# EAGLE board front pane - v2 (EAGLE 9.2.2)
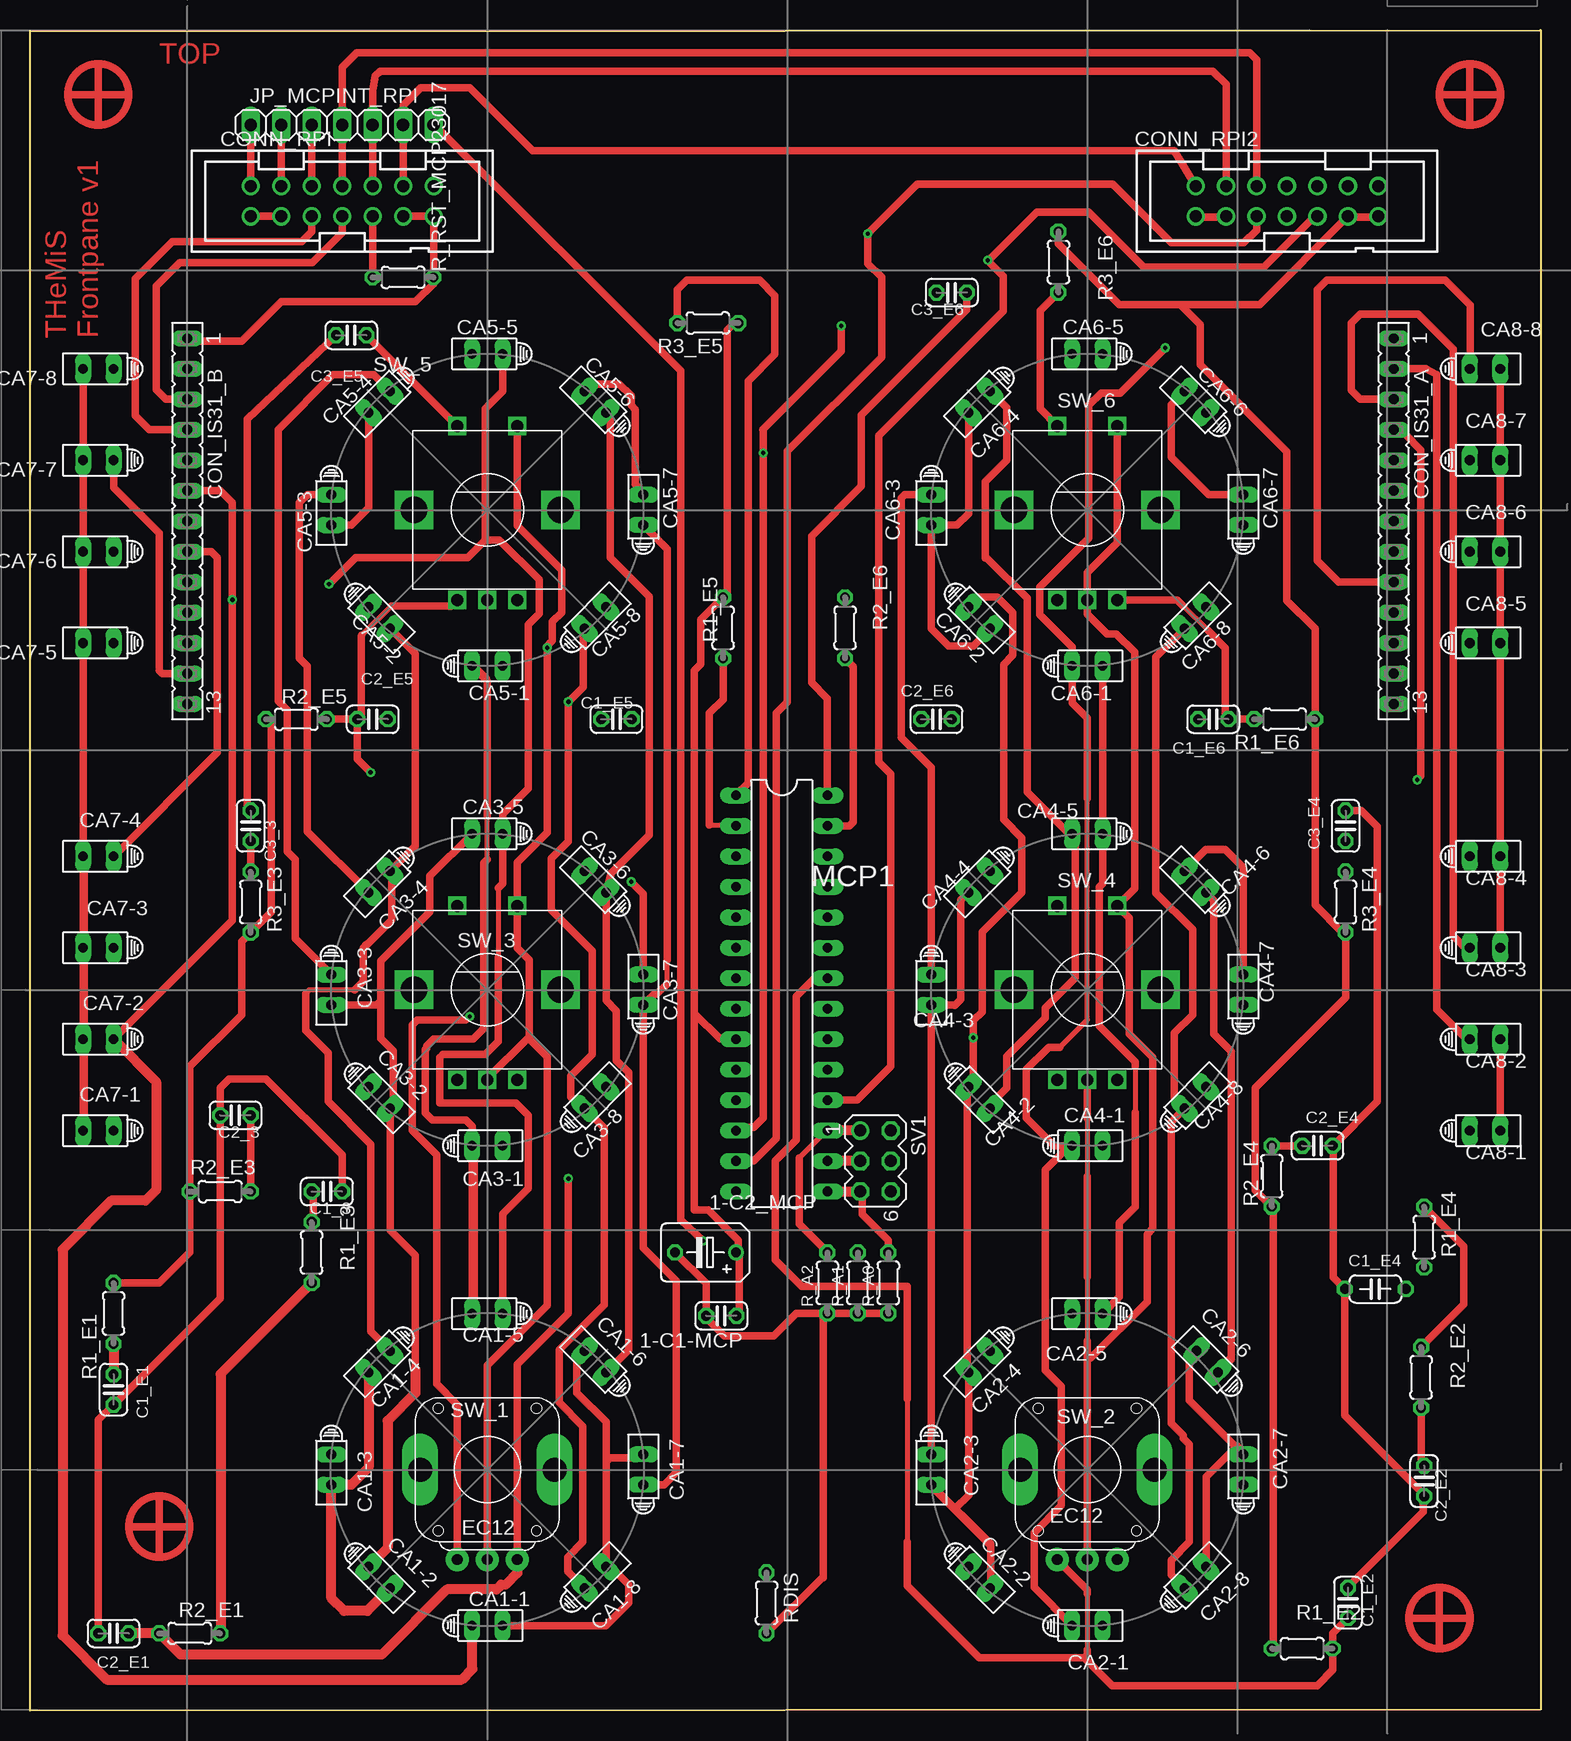
[diagram p0: board, top side]
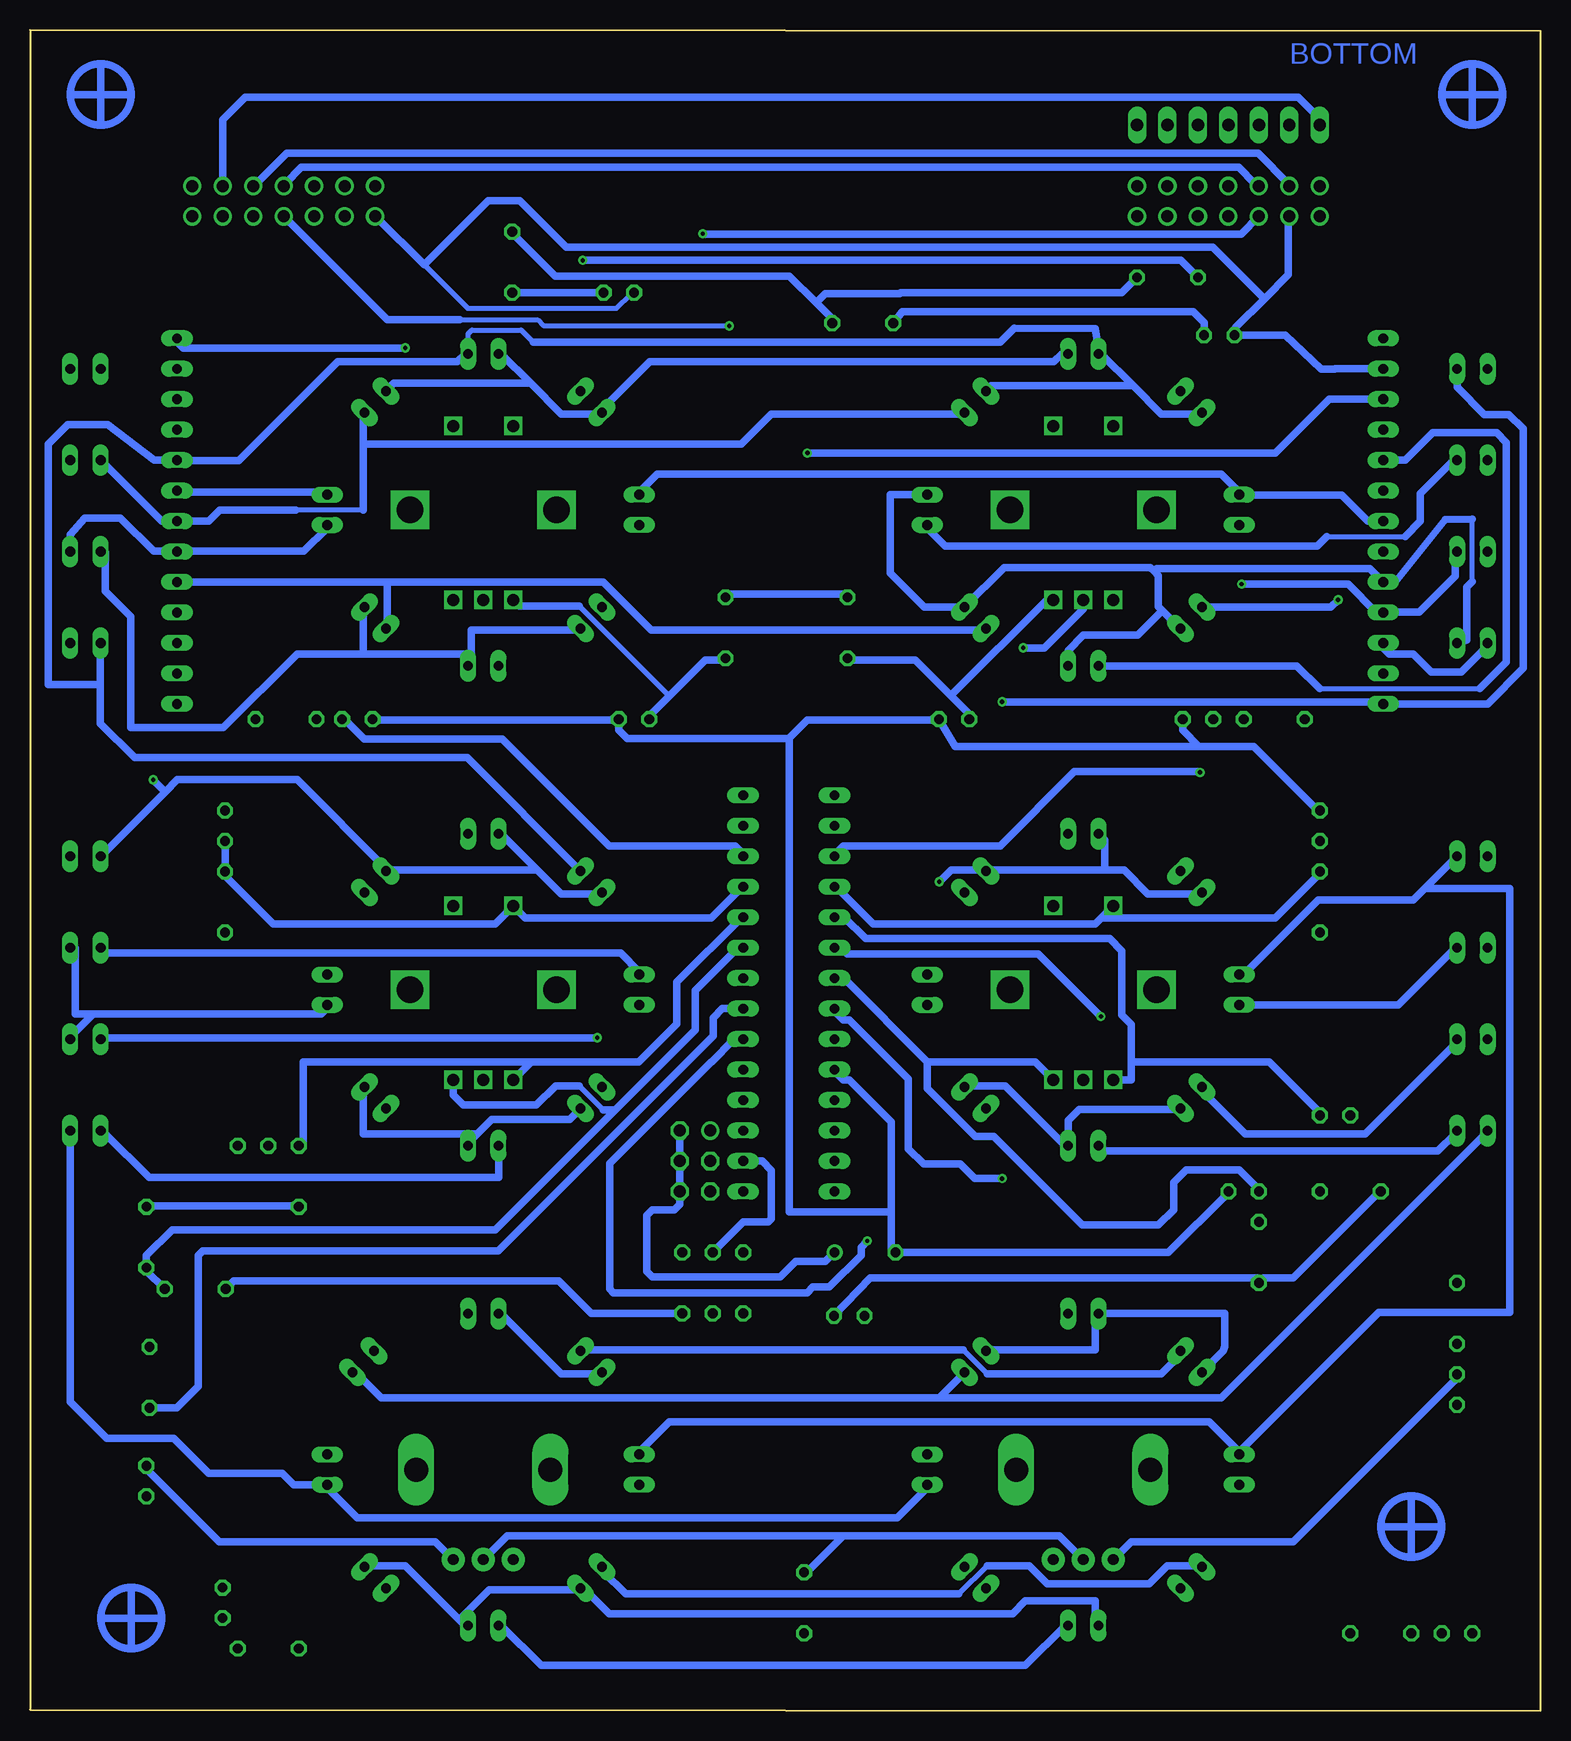
[diagram p1: board, bottom side, seen from below]

Size 125.88 x 140.1 mm. Coordinates in mm from the lower left corner, seen from the top.
Outline: 0,0 0,140 125.88,140.1 125.88,0.1 0,0
Copper layers (1*16): Top 0.035mm / dielectric 1.5mm / Bottom 0.035mm
Design rules "default *": minimum track width 0.4mm, minimum drill 0.35mm, track to track 0.4mm, track to pad 0.4mm, pad to pad 0.4mm, via to via 0.4mm, smd to smd 0.4mm, copper to edge 40mil, drill to drill 6mil, minimum pad ring 10mil, minimum via ring 8mil, stop-mask expansion 4mil, vias tented up to drill 0mil, thermal gap 0.4mm

## Footprints (pad centres in the part's own frame; a part is rotated, then mirrored left to right if it is on the bottom)
C025-024X044 = drill 0.813 octagon: 1 -1.27,0; 2 1.27,0
B45181B = drill 0.813: + -2.54,0 | drill 0.813 octagon: - 2.54,0
C050-024X044 = drill 0.813 octagon: 1 -2.54,0; 2 2.54,0
HLMP6 = drill 0.813 long: A -1.27,0; K 1.27,0
FE13 = drill 0.813 long: 1 -15.24,0; 2 -12.7,0; 3 -10.16,0; 4 -7.62,0; 5 -5.08,0; 6 -2.54,0; 7 0,0; 8 2.54,0; 9 5.08,0; 10 7.62,0; 11 10.16,0; 12 12.7,0; 13 15.24,0
PAK100/2500-14 = drill 1 pad 1.422: 1 -7.62,-1.27; 2 -7.62,1.27; 3 -5.08,-1.27; 4 -5.08,1.27; 5 -2.54,-1.27; 6 -2.54,1.27; 7 0,-1.27; 8 0,1.27; 9 2.54,-1.27; 10 2.54,1.27; 11 5.08,-1.27; 12 5.08,1.27; 13 7.62,-1.27; 14 7.62,1.27
1X07 = drill 1.016 long: 1 -7.62,0; 2 -5.08,0; 3 -2.54,0; 4 0,0; 5 2.54,0; 6 5.08,0; 7 7.62,0
DIL28-3 = drill 0.813 long: 1 -16.51,-3.81; 2 -13.97,-3.81; 3 -11.43,-3.81; 4 -8.89,-3.81; 5 -6.35,-3.81; 6 -3.81,-3.81; 7 -1.27,-3.81; 8 1.27,-3.81; 9 3.81,-3.81; 10 6.35,-3.81; 11 8.89,-3.81; 12 11.43,-3.81; 13 13.97,-3.81; 14 16.51,-3.81; 15 16.51,3.81; 16 13.97,3.81; 17 11.43,3.81; 18 8.89,3.81; 19 6.35,3.81; 20 3.81,3.81; 21 1.27,3.81; 22 -1.27,3.81; 23 -3.81,3.81; 24 -6.35,3.81; 25 -8.89,3.81; 26 -11.43,3.81; 27 -13.97,3.81; 28 -16.51,3.81
0204/5 = drill 0.813 octagon: 1 -2.54,0; 2 2.54,0
MA03-2 = drill 1.016: 1 -2.54,-1.27 | drill 1.016 octagon: 2 -2.54,1.27; 3 0,-1.27; 4 0,1.27; 5 2.54,-1.27; 6 2.54,1.27
EC12 = drill 0.9 pad 1.93: 1 -2.5,-7.5; 2 0,-7.5; 3 2.5,-7.5 | drill 2 long: M1 -5.6,0; M2 5.6,0
ALPS_EC12E_SW = drill 1 square: A -2.5,-7.5; B 2.5,-7.5; C 0,-7.5; D -2.5,7; E 2.5,7 | drill 2.2 square: GND1 -6.1,0; GND2 6.1,0

## Placement (x,y rotation side)
1-C1-MCP  100n  [C025-024X044]  57.61,32.92 180 top
1-C2_MCP  10u  [B45181B]  56.29,38.2 180 top
C1_3  100n  [C025-024X044]  24.74,43.28 0 top
C1_E1  100n  [C025-024X044]  6.96,26.77 270 top
C1_E2  100n  [C025-024X044]  109.83,8.99 90 top
C1_E4  100n  [C050-024X044]  112.12,35.15 180 top
C1_E5  100n  [C025-024X044]  48.87,82.65 0 top
C1_E6  100n  [C025-024X044]  98.6,82.65 180 top
C2_3  100n  [C025-024X044]  17.12,49.63 180 top
C2_E1  100n  [C025-024X044]  6.96,6.45 180 top
C2_E2  100n  [C025-024X044]  116.18,19.15 270 top
C2_E4  100n  [C025-024X044]  107.29,47.09 0 top
C2_E5  100n  [C025-024X044]  28.55,82.65 0 top
C2_E6  100n  [C025-024X044]  75.54,82.65 0 top
C3_3  100n  [C025-024X044]  18.39,73.76 90 top
C3_E4  100n  [C025-024X044]  109.63,73.76 90 top
C3_E5  100n  [C025-024X044]  26.77,114.66 180 top
C3_E6  100n  [C025-024X044]  76.81,118.21 180 top
CA1-1  HLMP6  [HLMP6]  38.11,7.1 0 top
CA1-2  HLMP6  [HLMP6]  29.11,11.1 315 top
CA1-3  HLMP6  [HLMP6]  25.11,20.1 270 top
CA1-4  HLMP6  [HLMP6]  29.11,29.1 225 top
CA1-5  HLMP6  [HLMP6]  38.11,33.1 180 top
CA1-6  HLMP6  [HLMP6]  47.11,29.1 135 top
CA1-7  HLMP6  [HLMP6]  51.11,20.1 90 top
CA1-8  HLMP6  [HLMP6]  47.11,11.1 45 top
CA2-1  HLMP6  [HLMP6]  88.11,7.1 0 top
CA2-2  HLMP6  [HLMP6]  79.11,11.1 315 top
CA2-3  HLMP6  [HLMP6]  75.11,20.1 270 top
CA2-4  HLMP6  [HLMP6]  79.11,29.1 225 top
CA2-5  HLMP6  [HLMP6]  88.11,33.1 180 top
CA2-6  HLMP6  [HLMP6]  98.11,29.1 135 top
CA2-7  HLMP6  [HLMP6]  101.11,20.1 90 top
CA2-8  HLMP6  [HLMP6]  97.11,11.1 45 top
CA3-1  HLMP6  [HLMP6]  38.11,47.1 0 top
CA3-2  HLMP6  [HLMP6]  29.11,51.1 315 top
CA3-3  HLMP6  [HLMP6]  25.11,60.1 270 top
CA3-4  HLMP6  [HLMP6]  29.11,69.1 225 top
CA3-5  HLMP6  [HLMP6]  38.11,73.1 180 top
CA3-6  HLMP6  [HLMP6]  47.11,69.1 135 top
CA3-7  HLMP6  [HLMP6]  51.11,60.1 90 top
CA3-8  HLMP6  [HLMP6]  47.11,51.1 45 top
CA4-1  HLMP6  [HLMP6]  88.11,47.1 0 top
CA4-2  HLMP6  [HLMP6]  79.11,51.1 315 top
CA4-3  HLMP6  [HLMP6]  75.11,60.1 270 top
CA4-4  HLMP6  [HLMP6]  79.11,69.1 225 top
CA4-5  HLMP6  [HLMP6]  88.11,73.1 180 top
CA4-6  HLMP6  [HLMP6]  97.11,69.1 135 top
CA4-7  HLMP6  [HLMP6]  101.11,60.1 90 top
CA4-8  HLMP6  [HLMP6]  97.11,51.1 45 top
CA5-1  HLMP6  [HLMP6]  38.11,87.1 0 top
CA5-2  HLMP6  [HLMP6]  29.11,91.1 315 top
CA5-3  HLMP6  [HLMP6]  25.11,100.1 270 top
CA5-4  HLMP6  [HLMP6]  29.11,109.1 225 top
CA5-5  HLMP6  [HLMP6]  38.11,113.1 180 top
CA5-6  HLMP6  [HLMP6]  47.11,109.1 135 top
CA5-7  HLMP6  [HLMP6]  51.11,100.1 90 top
CA5-8  HLMP6  [HLMP6]  47.11,91.1 45 top
CA6-1  HLMP6  [HLMP6]  88.11,87.1 0 top
CA6-2  HLMP6  [HLMP6]  79.11,91.1 315 top
CA6-3  HLMP6  [HLMP6]  75.11,100.1 270 top
CA6-4  HLMP6  [HLMP6]  79.11,109.1 225 top
CA6-5  HLMP6  [HLMP6]  88.11,113.1 180 top
CA6-6  HLMP6  [HLMP6]  97.11,109.1 135 top
CA6-7  HLMP6  [HLMP6]  101.11,100.1 90 top
CA6-8  HLMP6  [HLMP6]  97.11,91.1 45 top
CA7-1  HLMP6  [HLMP6]  5.69,48.36 180 top
CA7-2  HLMP6  [HLMP6]  5.69,55.98 180 top
CA7-3  HLMP6  [HLMP6]  5.69,63.6 180 top
CA7-4  HLMP6  [HLMP6]  5.69,71.22 180 top
CA7-5  HLMP6  [HLMP6]  5.69,89 180 top
CA7-6  HLMP6  [HLMP6]  5.69,96.62 180 top
CA7-7  HLMP6  [HLMP6]  5.69,104.24 180 top
CA7-8  HLMP6  [HLMP6]  5.69,111.86 180 top
CA8-1  HLMP6  [HLMP6]  121.26,48.36 0 top
CA8-2  HLMP6  [HLMP6]  121.26,55.98 0 top
CA8-3  HLMP6  [HLMP6]  121.26,63.6 0 top
CA8-4  HLMP6  [HLMP6]  121.26,71.22 0 top
CA8-5  HLMP6  [HLMP6]  121.26,89 0 top
CA8-6  HLMP6  [HLMP6]  121.26,96.62 0 top
CA8-7  HLMP6  [HLMP6]  121.26,104.24 0 top
CA8-8  HLMP6  [HLMP6]  121.26,111.86 0 top
CON_IS31_A  [FE13]  113.64,99.16 270 top
CON_IS31_B  [FE13]  13.11,99.16 270 top
CONN_RPI  2514-  [PAK100/2500-14]  26.01,125.83 0 top
CONN_RPI2  2514-  [PAK100/2500-14]  104.75,125.83 0 top
JP_MCPINT_RPI  [1X07]  26.01,132.18 0 top
MCP1  MCP23017SP  [DIL28-3]  62.64,59.79 270 top
R1_E1  100k  [0204/5]  6.96,33.12 270 top
R1_E2  100k  [0204/5]  106.02,5.18 0 top
R1_E3  100k  [0204/5]  23.47,38.2 90 top
R1_E4  100k  [0204/5]  116.18,39.47 270 top
R1_E5  100k  [0204/5]  57.76,90.27 270 top
R1_E6  100k  [0204/5]  104.55,82.65 180 top
R2_E1  100k  [0204/5]  13.31,6.45 180 top
R2_E2  100k  [0204/5]  115.93,27.79 270 top
R2_E3  100k  [0204/5]  15.85,43.28 0 top
R2_E4  100k  [0204/5]  103.48,44.55 90 top
R2_E5  100k  [0204/5]  22.2,82.65 0 top
R2_E6  100k  [0204/5]  67.92,90.27 270 top
R3_E3  100k  [0204/5]  18.39,67.41 90 top
R3_E4  100k  [0204/5]  109.63,67.41 90 top
R3_E5  100k  [0204/5]  56.49,115.67 180 top
R3_E6  100k  [0204/5]  85.7,120.75 270 top
R_A0  20k  [0204/5]  71.53,35.66 90 top
R_A1  20k  [0204/5]  68.99,35.66 90 top
R_A2  20k  [0204/5]  66.45,35.66 90 top
R_RST_MCP23017  100k  [0204/5]  31.09,119.48 180 top
RDIS  1k  [0204/5]  61.37,8.99 270 top
SV1  [MA03-2]  70.46,45.82 270 top
SW_1  EC12  [EC12]  38.11,20.1 0 top
SW_2  EC12  [EC12]  88.11,20.1 0 top
SW_3  EC12E_SW  [ALPS_EC12E_SW]  38.11,60.1 0 top
SW_4  EC12E_SW  [ALPS_EC12E_SW]  88.11,60.1 0 top
SW_5  EC12E_SW  [ALPS_EC12E_SW]  38.11,100.1 0 top
SW_6  EC12E_SW  [ALPS_EC12E_SW]  88.11,100.1 0 top

## Library data of the parts
1-C1-MCP 1-C2_MCP C1_3 C1_E1 C1_E2 C1_E4-C1_E6 C2_3 C2_E1 C2_E2 C2_E4-C2_E6 C3_3 C3_E4-C3_E6 = rcl; SPICEPREFIX: C
CA1-1-CA1-8 CA2-1-CA2-8 CA3-1-CA3-8 CA4-1-CA4-8 CA5-1-CA5-8 CA6-1-CA6-8 CA7-1-CA7-8 CA8-1-CA8-8 = display-hp; MF: AGILENT TECHNOLOGIES; MPN: HLMP-6500; OC_FARNELL: 1652490; OC_NEWARK: 40K0088
CON_IS31_A CON_IS31_B = con-lsta; OC_FARNELL: unknown; OC_NEWARK: unknown
CONN_RPI CONN_RPI2 = con-3m; OC_FARNELL: unknown; OC_NEWARK: unknown
JP_MCPINT_RPI = pinhead
MCP1 = microchip; MF: MICROCHIP; MPN: MCP23017-E/SP; OC_FARNELL: 1332088; OC_NEWARK: 31K2959
R1_E1-R1_E6 R2_E1-R2_E6 R3_E3-R3_E6 R_A0 R_A1 R_A2 R_RST_MCP23017 RDIS = resistor
SV1 = con-lstb; OC_FARNELL: unknown; OC_NEWARK: unknown
SW_1 SW_2 = rotary-encoder
SW_3-SW_6 = switch-alps; MPN: EC12E2424407; OC_FARNELL: 1520813; OC_NEWARK: 74M1068

## Nets
A0: MCP1.15 R_A0.2 SV1.5
A1: MCP1.16 R_A1.2 SV1.3
A2: MCP1.17 R_A2.2 SV1.1
CA1: CA1-1.K CA1-2.K CA1-3.K CA1-4.K CA1-5.K CA1-6.K CA1-7.K CA1-8.K CA2-1.A CA3-1.A CA4-1.A CA5-1.A CA6-1.A CA7-1.A CA8-1.A CON_IS31_A.1 CON_IS31_B.5
CA2: CA1-1.A CA2-1.K CA2-2.K CA2-3.K CA2-4.K CA2-5.K CA2-6.K CA2-7.K CA2-8.K CA3-2.A CA4-2.A CA5-2.A CA6-2.A CA7-2.A CA8-2.A CON_IS31_A.2 CON_IS31_B.6
CA3: CA1-2.A CA2-2.A CA3-1.K CA3-2.K CA3-3.K CA3-4.K CA3-5.K CA3-6.K CA3-7.K CA3-8.K CA4-3.A CA5-3.A CA6-3.A CA7-3.A CA8-3.A CON_IS31_A.3 CON_IS31_B.7
CA4: CA1-3.A CA2-3.A CA3-3.A CA4-1.K CA4-2.K CA4-3.K CA4-4.K CA4-5.K CA4-6.K CA4-7.K CA4-8.K CA5-4.A CA6-4.A CA7-4.A CA8-4.A CON_IS31_A.4 CON_IS31_B.8
CA5: CA1-4.A CA2-4.A CA3-4.A CA4-4.A CA5-1.K CA5-2.K CA5-3.K CA5-4.K CA5-5.K CA5-6.K CA5-7.K CA5-8.K CA6-5.A CA7-5.A CA8-5.A CON_IS31_A.5 CON_IS31_B.9
CA6: CA1-5.A CA2-5.A CA3-5.A CA4-5.A CA5-5.A CA6-1.K CA6-2.K CA6-3.K CA6-4.K CA6-5.K CA6-6.K CA6-7.K CA6-8.K CA7-6.A CA8-6.A CON_IS31_A.6 CON_IS31_B.10
CA7: CA1-6.A CA2-6.A CA3-6.A CA4-6.A CA5-6.A CA6-6.A CA7-1.K CA7-2.K CA7-3.K CA7-4.K CA7-5.K CA7-6.K CA7-7.K CA7-8.K CA8-7.A CON_IS31_A.7 CON_IS31_B.11
CA8: CA1-7.A CA2-7.A CA3-7.A CA4-7.A CA5-7.A CA6-7.A CA7-7.A CA8-1.K CA8-2.K CA8-3.K CA8-4.K CA8-5.K CA8-6.K CA8-7.K CA8-8.K CON_IS31_A.8 CON_IS31_B.12
CA9: CA1-8.A CA2-8.A CA3-8.A CA4-8.A CA5-8.A CA6-8.A CA7-8.A CA8-8.A CON_IS31_A.9 CON_IS31_B.13
DISCHARGE: RDIS.1 SW_1.2 SW_2.2 SW_3.C SW_3.E SW_4.C SW_4.E SW_5.C SW_5.E SW_6.C SW_6.E
GND: 1-C1-MCP.2 1-C2_MCP.- C1_3.2 C1_E1.2 C1_E2.2 C1_E4.2 C1_E5.2 C1_E6.2 C2_3.2 C2_E1.2 C2_E2.2 C2_E4.2 C2_E5.2 C2_E6.2 C3_3.2 C3_E4.2 C3_E5.2 C3_E6.2 CON_IS31_B.2 CONN_RPI2.1 CONN_RPI2.3 CONN_RPI.1 CONN_RPI.3 MCP1.10 R_A0.1 R_A1.1 R_A2.1 RDIS.2
GPA0: C2_E2.1 MCP1.21 R2_E2.2 SW_2.3
GPA1: C1_E2.1 MCP1.22 R1_E2.2 SW_2.1
GPA2: C1_E4.1 MCP1.23 R1_E4.2 SW_4.B
GPA3: C2_E4.1 MCP1.24 R2_E4.2 SW_4.A
GPA4: C3_E4.1 MCP1.25 R3_E4.2 SW_4.D
GPA5: C1_E6.1 MCP1.26 R1_E6.2 SW_6.B
GPA6: C2_E6.1 MCP1.27 R2_E6.2 SW_6.A
GPA7: C3_E6.1 MCP1.28 R3_E6.2 SW_6.D
GPB0: C3_E5.1 MCP1.1 R3_E5.2 SW_5.D
GPB1: C1_E5.1 MCP1.2 R1_E5.2 SW_5.B
GPB2: C2_E5.1 MCP1.3 R2_E5.2 SW_5.A
GPB3: C3_3.1 MCP1.4 R3_E3.2 SW_3.D
GPB4: C2_3.1 MCP1.5 R2_E3.2 SW_3.A
GPB5: C1_E1.1 MCP1.6 R1_E1.2 SW_1.1
GPB6: C1_3.1 MCP1.7 R1_E3.2 SW_3.B
GPB7: C2_E1.1 MCP1.8 R2_E1.2 SW_1.3
INT_MCP23017_1: JP_MCPINT_RPI.7 MCP1.20
INTA: CONN_RPI2.12 CONN_RPI.2 JP_MCPINT_RPI.1
INTB: CONN_RPI2.10 CONN_RPI.4 JP_MCPINT_RPI.2
INTC: CONN_RPI2.8 CONN_RPI.6 JP_MCPINT_RPI.3
INTD: CONN_RPI2.6 CONN_RPI.8 JP_MCPINT_RPI.4
INTE: CONN_RPI2.4 CONN_RPI.10 JP_MCPINT_RPI.5
INTF: CONN_RPI2.2 CONN_RPI.12 JP_MCPINT_RPI.6
RST_MCP: CONN_RPI2.9 CONN_RPI.9 MCP1.18 R_RST_MCP23017.2
SCL: CON_IS31_B.3 CONN_RPI2.7 CONN_RPI.7 MCP1.12
SDA: CON_IS31_B.4 CONN_RPI2.5 CONN_RPI.5 MCP1.13
VCC: 1-C1-MCP.1 1-C2_MCP.+ CON_IS31_B.1 CONN_RPI2.11 CONN_RPI2.13 CONN_RPI.11 CONN_RPI.13 MCP1.9 R1_E1.1 R1_E2.1 R1_E3.1 R1_E4.1 R1_E5.1 R1_E6.1 R2_E1.1 R2_E2.1 R2_E3.1 R2_E4.1 R2_E5.1 R2_E6.1 R3_E3.1 R3_E4.1 R3_E5.1 R3_E6.1 R_RST_MCP23017.1 SV1.2 SV1.4 SV1.6

## Tracks (layer width: path | path; a pad name or v marks a point on that pad's centre or on a via)
A0
  Top 0.4: 69.36,43.11 SV1.5
  Top 0.61: R_A0.2 71.53,39.2 69.36,41.36 69.36,43.11
  Top 0.813: MCP1.15 SV1.5
A1
  Top 0.813: SV1.3 MCP1.16
  Bottom 0.61: R_A1.2 66.45,40.74 64.36,40.74 64.11,41 64.11,45.06 64.87,45.82 MCP1.16
A2
  Top 0.4: 64.11,46.1 66.11,48.1 MCP1.17 | 66.11,38.6 R_A2.2
  Top 0.61: 66.11,38.6 64.11,40.6 64.11,46.1
  Top 0.813: SV1.1 MCP1.17
CA1  (via drill 0.35)
  Top 0.4: 88.11,76.05 88.11,57.6 85.82,55.31 | 38.11,70.97 38.11,74.52 38.11,86.1 37.11,87.1 CA5-1.A | CA1-5.K 37.11,33.1 37.11,47.1 CA3-1.A | 86.61,47.1 CA4-1.A | 33.04,55.39 33.04,55.22 | 33.63,55.98 33.5,55.85
  Top 0.61: CA1-7.K 50.84,21.1 48.36,21.1 48.01,20.75 | CA2-1.A 83.67,10.27 83.67,14.83 85.95,17.12 85.95,27.03 84.61,28.37 84.61,45.1 86.61,47.1 | CA1-5.K CA3-1.A 36.84,48.71 36.3,49.25 33.54,49.25 32.94,49.85 32.94,55.12 33.04,55.22 | CA5-1.A 38.11,85.83 38.11,74.52 | 38.11,70.97 37.8,70.66 37.8,56.85 36.93,55.98 33.63,55.98 | 33.5,55.85 33.04,55.39 | v94.61,113.6 90.84,109.83 89.26,109.83 88.24,108.81 88.24,97.73 84.57,94.06 84.56,94.06 84.15,93.65 84.15,91.36 86.84,88.67 CA6-1.A 86.84,84 88.11,82.73 88.11,76.05 | CA1-1.K 48,7.1 49.89,8.99 49.89,10.52 48.4,12 CA1-8.K 48.01,20.75 | CA1-6.K 45.57,29.36 45.57,26.52 48.01,24.08 48.01,20.75 | 85.82,55.31 84.88,55.31 83.01,53.44 83.01,49.43 85.33,47.1 CA4-1.A
  Top 0.813: CA1-2.K 28.12,8.32 26.17,8.32 25.11,9.38 CA1-3.K 26.77,18.83 28.21,20.27 CA1-4.K
  Bottom 0.406: 18.39,85.19 5.08,85.19
  Bottom 0.61: CA4-1.A 86.8,47.07 86.8,44.44 115.95,44.44 119.61,48.1 CA8-1.A | v94.61,113.6 113.11,113.6 113.61,114.1 CON_IS31_A.1 | CA2-1.A 86.61,7.1 83.29,3.78 42.93,3.78 39.61,7.1 CA1-1.K | 37.11,32.1 37.11,30.1 46.11,30.1 CA1-6.K | 37.11,33.1 37.11,33.12 26.33,33.12 26.33,30.38 26.43,29.98 CA1-4.K | 37.11,32.1 37.11,33.1 | 37.11,33.1 CA1-5.K 37.11,32.1 | CA3-1.A 36.38,46.64 8.57,46.64 7.11,48.1 CA7-1.A | CA5-1.A 20.3,87.1 18.39,85.19 | 5.08,85.19 2.84,87.43 2.84,105.71 3.66,106.53 8.99,106.53 11.28,104.24 CON_IS31_B.5
CA2  (via drill 0.35)
  Top 0.4: 100.61,22.1 101.11,21.6 CA2-7.K | 77.11,16.6 80.11,13.6 80.11,10.6 80.04,10.34 CA2-2.K | 77.11,16.6 75.11,18.6 CA2-3.K | 77.11,16.87 77.11,16.6 | 78.11,28.6 CA2-4.K
  Top 0.61: CA8-2.A 119.61,56.1 117.24,58.47 117.24,111.35 116.33,111.86 CON_IS31_A.2 | CA7-2.A 6.99,55.98 16.87,65.86 v16.87,92.6 16.87,97.94 16.87,97.95 16.87,100.69 15.85,101.7 CON_IS31_B.6 | CA2-8.K 98.01,19.5 100.61,22.1 | CA2-4.K 78.21,17.97 77.11,16.87 | CA2-3.K 80.04,13.9 80.04,10.34 | CA2-6.K 96.62,29.41 96.62,25.86 CA2-7.K | CA6-2.A 79.02,92.81 80.62,92.81 81.89,91.54 81.89,87.99 81.13,87.22 81.13,74.27 82.65,72.75 82.65,68.21 79.35,64.91 79.35,58.27 78.61,57.53 v78.61,56.1 78.61,52.4 CA4-2.A 78.11,51.9 78.11,28.6
  Top 0.813: CA7-2.A 10.52,52.43 10.52,43.41 9.63,42.52 6.78,42.52 2.72,38.46 2.72,6.27 6.4,2.59 35.97,2.59 36.86,3.48 36.86,7.09 CA1-1.A
  Bottom 0.61: v16.87,92.6 17.48,91.99 28,91.99 28.11,92.1 CA5-2.A | CA3-2.A 28.11,51.6 24.61,48.1 14.61,48.1 7.11,55.6 CA7-2.A | 90.11,7.6 94.61,12.1 97.61,12.1 CA2-8.K | 90.11,7.6 89.61,7.1 CA2-1.K | CA1-1.A 37.11,7.1 37.11,9.15 42.93,9.15 43.98,8.1 77.61,8.1 79.61,10.1 CA2-2.K 80.11,10.1 87.61,10.1 90.11,7.6 | CA2-5.K 86.61,33.1 81.61,28.1 78.61,28.1 CA2-4.K | v78.61,56.1 119.61,56.1 CA8-2.A
CA3  (via drill 0.35)
  Top 0.4: 72.61,81.13 72.61,81.38 | 72.61,100.94 72.61,101.1
  Top 0.61: CA8-3.A 119.61,63.6 118.61,64.6 118.61,113.5 115.67,116.43 110.85,116.43 110.08,115.67 110.08,110.08 110.85,109.32 CON_IS31_A.3 | v50.11,69.1 51.11,68.1 CA3-7.K | CA5-3.A 23.14,101.37 22.45,100.69 22.45,87.73 23.11,87.08 23.11,73.31 CA3-4.K | 32.11,28.42 32.11,37.95 30.01,40.05 CA3-2.K 30.28,50.47 30.28,55.01 29.25,56.05 29.25,59.18 | CA4-3.A 75.11,78.63 72.61,81.13 | 72.61,81.38 72.61,100.94 | 72.61,101.1 72.88,101.37 CA6-3.A | CA3-5.K 33.3,69.56 33.3,66.56 29.25,62.51 29.25,59.18 | CA3-3.K 28.9,58.83 29.25,59.18
  Top 0.813: CA1-2.A 29.8,13.59 29.8,24.18 32.11,26.49 32.11,28.42
  Bottom 0.406: 46.11,12.1 48.47,9.75
  Bottom 0.61: CA8-3.A 119.53,63.14 76.65,63.14 75.11,61.6 CA4-3.A | CON_IS31_B.7 14.4,99.16 16.56,101.32 25.11,101.32 CA5-3.A 25.11,101.6 26.61,103.1 73.61,103.1 75.11,101.6 CA6-3.A | CA7-3.A 7.11,63.6 11.88,58.83 CA3-3.K | CA3-4.K 28.61,68.1 32.73,68.1 34.71,70.09 36.32,70.09 | 36.32,70.09 46.09,70.09 46.11,70.1 CA3-6.K 46.61,70.1 49.11,70.1 v50.11,69.1 | CA3-8.K 47.61,52.1 44.61,52.1 39.61,47.1 CA3-1.K 39.38,49.22 38.46,50.14 30.07,50.14 CA3-2.K | 48.47,9.75 76.25,9.75 78.11,11.6 CA2-2.A | 46.11,12.1 42.61,12.1 41.11,10.6 32.61,10.6 31.11,12.1 28.61,12.1 CA1-2.A | CA3-5.K 36.32,72.58 36.32,70.09
CA4  (via drill 0.35)
  Top 0.4: 86.61,73.1 CA4-5.K
  Top 0.61: v115.61,77.6 115.91,77.91 115.91,105.1 114.6,106.41 CON_IS31_A.4 | CON_IS31_B.8 15.09,96.62 15.6,96.11 15.6,79.86 CA7-4.A | CA2-3.A CA4-3.K 77.01,58.83 77.06,58.78 77.57,59.28 77.57,67.56 CA4-4.K | CA5-4.A 28.65,111.35 25.25,111.35 20.68,106.78 20.68,84.18 21.44,83.41 21.44,71.64 22.11,70.97 22.11,64.37 CA3-3.A | CA4-7.K 101.11,70.29 99.62,71.78 97.99,71.78 CA4-6.K | CA6-4.A 81.38,108.63 81.38,104.24 79.61,102.47 79.61,96.1 79.75,96.1 83.11,92.74 83.11,76.6 86.61,73.1 | CA4-5.K 87.11,72.83 87.11,61.1 84.61,58.6 84.61,57.73 81.4,54.53 81.4,51.9 80.01,50.5 CA4-2.K
  Bottom 0.61: CA3-3.A 24.73,61.37 18.52,67.59 10.63,67.59 9.67,68.54 | 9.67,68.54 7.11,71.1 CA7-4.A | 9.67,68.54 2.55,68.54 2.55,33.22 13.49,33.22 25.11,21.6 | 114.61,76.6 113.59,77.62 103.63,77.62 96.11,70.1 | 114.61,76.6 CA8-4.A | 114.61,76.6 v115.61,77.6 | 25.11,21.6 27.61,24.1 72.61,24.1 75.11,21.6 CA2-3.A | 88.61,48.1 89.61,47.1 CA4-1.K | 88.61,48.1 87.41,49.3 80.91,49.3 80.11,50.1 CA4-2.K | 88.61,48.1 98.11,48.1 98.11,51.6 CA4-8.K | 83.59,70.09 86.61,73.1 CA4-5.K | 83.59,70.09 81.61,68.1 78.61,68.1 CA4-4.K | 96.11,70.1 96.09,70.09 83.59,70.09 | 96.11,70.1 CA4-6.K | 25.11,21.6 CA1-3.A
CA5
  Top 0.4: 51.11,101.6 CA5-7.K | 27.08,60.1 23.27,60.1 22.96,59.79
  Top 0.61: CA5-6.K 46.8,110.59 49.12,110.59 50.11,109.61 50.11,108.81 50.45,108.48 50.45,102.26 51.11,101.6 | CA1-4.A 28.4,31.61 28.4,47.21 24.84,50.77 24.84,54.83 22.96,56.71 22.96,59.79 | CA5-4.K 28.21,100.29 26.76,98.83 CA5-3.K | 27.08,60.1 27.79,60.81 27.79,63.6 28.04,63.86 28.09,63.86 30.14,65.91 30.14,69.86 CA3-4.A 32.11,72.1 32.11,88.11 CA5-2.K
  Bottom 0.406: 48.11,30.1 46.11,28.1 | 83.94,114.1 84.94,115.1 89.06,115.1 89.38,114.78 CA6-5.A | 5.69,94.11 5.69,99.31
  Bottom 0.61: CA6-5.A 89.61,113.1 90.26,112.45 100.22,112.45 108.48,104.19 113.59,104.19 CON_IS31_A.5 115.54,104.24 119.41,107.21 122.75,107.21 124.36,105.6 124.36,85.53 120.02,85.53 | CA4-4.A 89.45,79.44 117.15,79.44 120.02,82.31 120.02,85.53 | CA8-5.A 120.02,88.98 120.02,85.53 | 46.11,28.1 31.61,28.1 30.11,29.6 CA1-4.A | 48.11,30.1 79.61,30.1 CA2-4.A | CA5-7.K 51.11,101.36 54.18,101.36 54.18,94.82 51.36,92 CA5-8.K 44.71,95.3 32.51,95.3 32.21,95 | 33.95,110.44 31.61,108.1 28.61,108.1 CA5-4.K | 33.95,110.44 36.61,113.1 | 36.61,113.1 36.66,113.15 36.76,113.17 37.11,115.23 43.87,115.25 45.02,114.1 83.94,114.1 | 33.95,110.44 45.77,110.44 46.11,110.1 CA5-6.K | 13.11,94.1 12.11,94.1 7.93,99.31 5.69,99.31 | CA7-5.A 6.15,89.23 6.15,93.65 5.69,94.11 | 13.11,94.1 14.22,95.21 31.99,95.21 32.21,95 | 13.11,94.1 CON_IS31_B.9 | 36.61,113.1 CA5-5.K | CA5-1.K 39.38,88.38 38.1,89.66 33.55,89.66 31.6,91.61 31.6,91.79 | 32.21,95 31.85,94.64 31.85,92.05 31.6,91.79 | 31.6,91.79 CA5-2.K
CA6  (via drill 0.35)
  Top 0.4: 92.11,53.7 92.11,49.89 | 34.39,54.71 34.14,54.46
  Top 0.406: 39.01,68.58 39.01,62.79
  Top 0.61: 34.14,54.46 34.14,50.65 40.49,50.65 41.5,49.63 41.5,43.54 39.38,41.41 CA1-5.A | CA5-5.A 39.38,109.99 37.95,108.56 37.95,97.6 | 37.95,97.6 36.49,96.14 27.15,96.14 v24.92,93.91 | CA2-5.A 90.78,34.5 90.78,40.68 92.11,42.01 92.11,49.89 | CA6-6.K 95.1,108.89 95.1,104.5 98.22,101.37 CA6-7.K | 37.95,97.6 39.11,97.6 42.42,94.29 42.42,91.44 41.5,90.53 41.5,76.88 39.38,74.75 CA3-5.A 39.38,68.95 39.01,68.58 | CA6-4.K 78.21,99.8 77.24,98.83 CA6-3.K 75.11,90.19 76.56,88.75 78.59,88.75 80.01,90.17 CA6-2.K | 92.11,53.7 92.11,54.1 89.11,57.1 89.11,68.68 89.38,68.95 CA4-5.A CA6-1.K | 39.01,62.79 39.01,55.78 37.95,54.71 34.39,54.71
  Bottom 0.61: 13.11,91.6 13.72,91.6 16.02,93.91 v24.92,93.91 | 13.11,91.6 10.11,91.6 7.11,94.6 7.11,96.6 CA7-6.A | CA5-5.A 39.91,113.1 40.56,112.46 74.25,112.46 78.11,108.6 CA6-4.K 78.61,108.1 81.61,108.1 84.15,110.64 | 84.15,110.64 86.61,113.1 CA6-5.K | 89.11,88.1 89.11,90.1 80.11,90.1 CA6-2.K | 89.11,88.1 89.11,87.1 CA6-1.K 89.11,88.1 | 98.11,88.1 98.11,91.6 CA6-8.K | 89.11,88.1 98.11,88.1 | 98.11,88.1 103.61,88.1 109.77,81.94 117.49,81.94 117.49,91.22 119.61,93.34 119.61,96.6 CA8-6.A | 84.15,110.64 95.57,110.64 96.11,110.1 CA6-6.K | CON_IS31_A.6 113.61,101.6 101.11,101.6 CA6-7.K | 13.11,91.6 CON_IS31_B.10
CA7
  Top 0.4: CA7-1.K 4.61,48.6 4.61,55.6 CA7-2.K 4.61,56.1 4.61,63.6 | 4.61,63.6 4.61,71.1 CA7-4.K | 4.61,63.6 CA7-3.K | 4.61,89.1 CA7-5.K | 99.11,28.6 100.11,29.6 100.11,39.22 | 48.11,108.1 CA5-6.A
  Top 0.61: 99.11,28.6 CA2-6.A 100.11,29.31 100.11,39.22 100.11,54.97 98.65,56.42 98.65,67.56 CA4-6.A | CA7-1.K CA7-4.K CA7-5.K | CA1-6.A 49.89,30.08 49.89,53.19 48.87,54.2 48.87,58.34 48.01,59.2 CA3-6.A 48.42,69.83 51.59,73 51.61,73 51.61,92.87 48.36,96.11 48.36,107.85 48.11,108.1 | CA7-8.K CA7-7.K CA7-6.K 4.42,89.29 4.61,89.1
  Bottom 0.406: 98.11,100.1 103.71,100.1 arc-90 103.73,100.08
  Bottom 0.61: CON_IS31_B.11 13.11,88.6 12.61,88.1 10.59,88.1 9.09,86.6 6.61,86.6 4.61,88.6 CA7-5.K | CA8-7.A 114.91,99.16 CON_IS31_A.7 111,99.16 110.08,100.08 103.73,100.08 | 98.11,105.6 98.11,100.1 | 98.11,105.6 98.11,108.1 CA6-6.A | 98.11,105.6 66.61,105.6 64.11,108.1 48.11,108.1 CA5-6.A | 50.11,26.1 96.61,26.1 98.61,28.1 CA2-6.A | 50.11,26.1 48.11,28.1 CA1-6.A | 50.11,26.1 26.61,26.1 4.61,48.1 CA7-1.K
CA8
  Top 0.4: CA8-8.K 122.61,111.6 122.61,104.6 CA8-7.K 122.61,104.1 122.61,97.1 CA8-6.K 122.61,96.6 122.61,89.1 CA8-5.K 122.61,88.6 122.61,71.6 CA8-4.K 122.61,71.1 122.61,63.6 CA8-3.K | 53.87,19.86 53.87,20.17 | 51.11,58.6 51.11,48.36 | 53.11,60.6 53.11,62.59 | 51.11,58.6 52.24,59.73 52.36,59.85 | 51.11,58.6 CA3-7.A | 10.77,86.72 10.77,86.97
  Top 0.61: CA1-7.A 52.84,18.83 53.87,19.86 | 53.87,20.17 53.87,35.84 51.11,38.6 51.11,48.36 CA3-7.A 52.01,59.73 52.24,59.73 | 52.36,59.85 53.11,60.6 | CA5-7.A 53.11,96.83 53.11,62.59 | CA8-8.K 122.53,88.68 122.61,88.6 | CA8-5.K 122.53,71.18 | 122.53,71.18 122.61,71.1 | CA8-2.K CA8-1.K | CA8-3.K 122.53,71.18 | CON_IS31_B.12 11.02,86.46 10.77,86.72 | 10.77,86.97 10.77,98.15 6.96,101.96 CA7-7.A
  Bottom 0.406: 17.82,97.89 11.28,97.89
  Bottom 0.61: CA8-6.K 122.53,98.04 121.33,99.41 118.35,99.41 115.58,96.64 113.66,96.64 CON_IS31_A.8 113.64,96.64 103.07,96.64 101.11,98.6 CA6-7.A | 120.61,58.1 101.61,58.1 101.11,58.6 CA4-7.A | 120.61,58.1 122.61,56.1 CA8-2.K | 120.61,58.1 122.11,58.1 122.11,63.6 CA8-3.K | CA5-7.A 51.11,98.6 49.61,97.1 18.61,97.1 17.82,97.89 | CA1-7.A 51.11,18.6 53.61,16.1 98.61,16.1 101.11,18.6 CA2-7.A 103.89,18.83 104.85,19.8 110.98,19.8 113.89,22.71 119.48,22.71 122.53,25.76 CA8-1.K | 11.28,97.89 10.01,99.16 10.01,101.45 7.21,104.24 CA7-7.A
CA9  (via drill 0.35)
  Top 0.4: 46.11,90.1 CA5-8.A | 45.97,31.96 46.11,32.1 | 46.11,50.1 CA3-8.A | 96.11,22.96 96.11,22.71
  Top 0.61: 46.11,90.1 46.11,85.34 v44.87,84.1 44.87,72.46 43.43,71.02 43.43,66.75 46.84,63.35 46.84,54.71 45.06,52.93 45.06,51.15 46.11,50.1 | CA8-8.A 120.04,111.91 120.04,117.14 117.96,119.23 108.05,119.23 107.29,118.47 107.29,95.86 109.07,94.08 CON_IS31_A.9 | 96.11,22.96 95.11,23.96 95.11,49.1 CA4-8.A 95.35,51.06 95.35,56.49 96.88,58.01 96.88,65.13 93.83,68.17 93.83,87.82 CA6-8.A | 96.11,22.71 96.62,22.2 96.62,14.07 95.1,12.55 95.1,11.32 CA2-8.A | CA3-8.A 47.85,48.56 47.85,33.85 45.97,31.96 | CA1-8.A 44.81,11.61 44.81,12.8 46.08,14.07 46.08,23.72 44.11,25.69 44.11,30.1 46.11,32.1
  Bottom 0.61: v44.87,84.1 13.11,84.1 | 13.11,84.1 CON_IS31_B.13 | 96.11,94.1 96.11,90.6 CA6-8.A | 96.11,94.1 78.11,94.1 74.11,90.1 46.61,90.1 CA5-8.A | 96.11,94.1 113.62,94.1 CON_IS31_A.9 | CA7-8.A 6.96,110.34 4.67,108.05 2.64,108.05 1.44,106.85 1.44,86.9 4.42,83.92 12.93,83.92 13.11,84.1
DISCHARGE  (via drill 0.35)
  Top 0.4: SW_2.2 88.11,29.1 | 88.11,29.1 88.11,30.84 88.11,36.17 | 88.11,49.38 88.11,44.55 | 88.11,29.1 88.41,29.4
  Top 0.61: SW_5.E 40.61,98.79 44.3,95.1 44.3,91.54 43.54,90.78 43.54,89.19 43.03,88.68 v43.11,88.6 43.11,73.21 40.61,70.71 SW_3.E 40.61,63.59 41.61,62.59 41.61,56.21 41.5,56.1 | 41.5,56.1 38.11,52.71 SW_3.C | 41.5,56.1 43.11,54.5 43.11,33.8 38.11,28.8 SW_1.2 | SW_2.2 88.11,30.84 | 88.41,29.4 93.11,34.1 93.11,39.73 93.57,40.19 93.57,54.46 91.61,56.42 91.61,66.1 SW_4.E 92.05,68.54 92.05,88.24 90.53,89.76 89.76,89.76 88.11,91.42 SW_6.C 88.11,94.89 90.61,97.39 SW_6.E | SW_4.C 88.11,49.38 | 88.11,44.55 88.11,36.17
  Bottom 0.61: SW_5.C 38.11,91.84 41.35,88.6 v43.11,88.6 | 58.11,14.6 61.11,11.6 RDIS.1 | 58.11,14.6 40.11,14.6 SW_1.2 | SW_2.2 86.11,14.6 58.11,14.6
GND
  Top 0.4: 110.11,10.6 C1_E2.2 | 108.61,46.6 C2_E4.2 108.61,47.1 | 116.11,18.1 C2_E2.2 | 18.11,75.1 C3_3.2 | 97.41,124.5 CONN_RPI2.1 | 99.41,124.5 CONN_RPI2.3
  Top 0.61: 110.11,10.6 116.11,16.6 116.11,17.6 C2_E2.2 | 108.61,46.6 108.61,36.12 C1_E4.2 109.58,24.64 116.11,18.1 | 108.61,47.1 112.28,50.77 112.28,73.7 110.95,75.03 C3_E4.2 | 18.11,75.1 18.11,107.67 C3_E5.2 | 99.41,124.5 97.41,124.5 | CONN_RPI.1 CONN_RPI.3 | RDIS.2 66.02,11.1 66.11,11.1 66.11,32.78 R_A2.1 | C2_E1.2 5.69,24.23 C1_E1.2 15.85,34.39 C2_3.2 15.85,51.92 16.61,52.68 19.66,52.68 26.01,46.33 C1_3.2 | 1-C2_MCP.- 56.34,35.61 1-C1-MCP.2 56.34,32.76 57.86,31.24 61.98,31.24 63.86,33.12 R_A2.1 | R_A0.1 R_A1.1 R_A2.1
  Bottom 0.406: 75.81,118.1 77.01,116.9 89.41,116.9 93.03,120.52
  Bottom 0.61: CON_IS31_B.2 17.13,111.86 17.16,111.83 18.26,111.83 21.25,114.66 C3_E5.2 25.39,115.32 22.98,117.73 | C1_E6.2 97.11,82.6 77.11,82.6 C2_E6.2 76.81,81.73 76.13,81.05 62.61,81.05 | 28.47,80.39 23.9,80.39 18.61,75.1 C3_3.2 | C2_E5.2 29.82,81.74 28.47,80.39 | 28.47,80.39 48.78,80.39 C1_E5.2 50.61,82.6 61.11,82.6 62.61,81.1 62.61,81.05 | 54.11,41.6 54.11,38.6 1-C2_MCP.- 31.01,38.2 26.11,43.1 C1_3.2 | 54.11,41.6 54.11,49.1 57.61,52.6 58.11,52.6 58.61,53.1 MCP1.10 | 62.61,81.05 62.61,41.6 54.11,41.6 | 22.98,117.73 21.01,119.7 21.01,124.5 CONN_RPI.3 | 75.81,118.1 C3_E6.2 | CONN_RPI2.1 97.01,124.5 93.03,120.52 87.68,125.87 85.05,125.87 81.19,122 27.31,122 23.03,117.73 22.98,117.73 | R_A0.1 79.1,33.12 81.81,35.84 108.89,35.84 C1_E4.2
GPA0
  Top 0.61: R2_E2.2 115.93,20.68 C2_E2.1
  Bottom 0.61: SW_2.3 92.11,14.1 110.11,14.1 116.11,20.1 C2_E2.1 | MCP1.21 68.17,58.52 68.94,57.76 68.94,56.24 86.84,38.33 111.48,38.33 111.86,37.95 111.86,27.03 113.64,25.25 R2_E2.2
GPA1
  Top 0.4: 73.11,26.01 73.11,14.1 | 88.11,9.75 88.11,5.1
  Top 0.61: SW_2.1 88.11,10.1 88.11,9.75 | 87.86,4.42 90.17,2.1 107.26,2.1 108.56,3.4 R1_E2.2 108.56,6.45 C1_E2.1 | 73.11,14.1 73.11,10.41 79.1,4.42 87.86,4.42 | 88.11,5.1 88.11,4.67 87.86,4.42 | MCP1.22 65.4,61.06 63.87,59.54 63.87,47.6 62.09,45.82 62.09,37.57 64.3,35.36 73.11,35.36 73.11,26.01
GPA2
  Bottom 0.406: 80.11,52.1 78.11,50.1
  Bottom 0.61: 78.11,50.1 77.11,50.1 | 80.11,52.1 82.09,52.1 83.7,50.49 89.77,50.49 90.61,51.33 SW_4.B | 77.11,50.1 87.12,40.09 114.03,40.09 116.18,37.95 R1_E4.2 116.18,36.68 C1_E4.1 | 77.11,50.1 70.46,56.75 70.46,60.05 67.16,63.35 67.16,63.6 MCP1.23
GPA3
  Top 0.61: R2_E4.2 C2_E4.1
  Bottom 0.61: MCP1.24 66.61,66.1 71.98,60.73 71.98,57.25 75.13,54.1 84.11,54.1 | SW_4.A 84.11,54.1 | 84.11,54.1 103.11,54.1 103.11,47.1 R2_E4.2
GPA4
  Bottom 0.61: MCP1.25 66.61,68.6 69.11,66.1 84.61,66.1 SW_4.D 87.11,65.6 105.61,65.6 109.61,69.6 R3_E4.2 C3_E4.1
GPA5
  Top 0.4: 98.17,90.04 96.11,92.1
  Top 0.61: R1_E6.2 C1_E6.1 99.61,82.91 99.61,88.6 98.17,90.04 | SW_6.B 95.61,92.6 96.11,92.1
  Bottom 0.61: MCP1.26 66.61,71.6 67.11,72.1 77.61,72.1 86.51,81 98.01,81 99.61,82.6 C1_E6.1
GPA6
  Top 0.61: MCP1.27 68.27,73.76 68.61,74.1 68.61,87.04 R2_E6.2
  Bottom 0.406: 72.61,84.6 80.11,92.1
  Bottom 0.61: C2_E6.1 74.11,83.1 72.61,84.6 69.61,87.6 68.11,87.6 R2_E6.2 | SW_6.A 85.11,92.1 80.11,92.1
GPA7
  Top 0.61: R3_E6.2 84.18,116.69 84.18,108.54 SW_6.D | MCP1.28 66.45,84.38 65.13,85.7 65.13,97.93 69.26,102.07 69.26,107.98 78.08,116.79 C3_E6.1
  Bottom 0.61: C3_E6.1 78.1,118.2 85.68,118.2 R3_E6.2
GPB0
  Top 0.4: 59.86,77.35 59.11,76.6 MCP1.1
  Top 0.61: C3_E5.1 35.6,107.1 SW_5.D | R3_E5.2 53.95,118.47 54.71,119.23 60.81,119.23 62.08,117.96 62.08,113.07 59.86,110.85 59.86,77.35 58.83,76.32 MCP1.1
  Bottom 0.61: C3_E5.1 28.04,115.71 28.95,116.61 53.21,116.61 R3_E5.2
GPB1
  Top 0.4: 56.61,73.85 58.77,73.85 MCP1.2
  Top 0.61: 56.61,73.85 56.61,83.16 57.76,84.31 R1_E5.2
  Bottom 0.61: 49.14,84.63 52.11,87.6 57.61,87.6 R1_E5.2 | C1_E5.1 47.61,83.1 49.14,84.63 | 49.14,84.63 41.17,92.6 SW_5.B
GPB2  (via drill 0.35)
  Top 0.4: 30.11,92.1 27.65,89.64 | 27.61,83.1 C2_E5.1
  Top 0.61: v28.38,78.22 27.28,79.32 C2_E5.1 R2_E5.2 | SW_5.A 35.11,92.1 30.11,92.1 | 27.65,89.64 27.61,89.6 27.61,83.1
  Bottom 0.61: v28.38,78.22 28.43,78.27 38.87,78.27 45.04,72.1 58.11,72.1 58.61,71.6 MCP1.3
GPB3
  Top 0.61: C3_3.1 R3_E3.2
  Bottom 0.61: SW_3.D 36.61,66.1 | 36.61,66.1 37.11,65.6 55.61,65.6 58.61,68.6 MCP1.4 | 36.61,66.1 22.11,66.1 18.61,69.6 R3_E3.2
GPB4
  Top 0.61: C2_3.1 R2_E3.2
  Bottom 0.61: 34.11,54.1 34.11,52.6 SW_3.A | 34.11,54.1 34.11,57.22 34.9,58.01 34.9,63.35 35.92,64.36 56.24,64.36 58.01,66.14 MCP1.5 | 34.11,54.1 22.61,54.1 18.61,50.1 C2_3.1
GPB5  (via drill 0.35)
  Top 0.61: SW_1.1 35.61,25.5 33.88,27.23 33.88,46.33 31.84,48.37 31.84,57.15 32.26,57.57 36.33,57.57 v36.63,57.88
  Top 0.813: R1_E1.2 C1_E1.1
  Bottom 0.61: v36.63,57.88 41.85,63.09 57.76,63.09 58.27,63.6 MCP1.6 | SW_1.1 34.11,14.1 20.61,14.1 7.11,27.6 C1_E1.1
GPB6
  Top 0.4: 23.61,41.1 R1_E3.2 | 23.61,43.1 C1_3.1
  Top 0.61: 23.61,43.1 23.61,41.1
  Bottom 0.61: 51.11,54.1 42.11,54.1 SW_3.B | C1_3.1 23.61,43.6 25.11,45.1 29.52,45.1 30.58,44.04 30.58,41.76 31.85,40.49 38.2,40.49 45.57,47.85 47.09,47.85 51.11,51.87 51.11,54.1 | MCP1.7 58.07,61.06 51.11,54.1
GPB7  (via drill 0.35)
  Top 0.61: 39.64,10.52 39.27,10.52 | v44.87,44.36 44.87,33.13 40.61,28.86 SW_1.3
  Top 0.813: SW_1.3 40.61,11.49 39.64,10.52 | 39.27,10.52 38.86,10.11 34.75,10.11 29.31,4.67 12.55,4.67 R2_E1.2 C2_E1.1
  Bottom 0.61: v44.87,44.36 47.16,44.36 48.37,45.57 51.41,45.57 52.68,46.84 52.68,52.68 57.61,57.6 58.11,57.6 58.61,58.1 MCP1.8
INT_MCP23017_1  (via drill 0.35)
  Top 0.4: 33.81,132.1 JP_MCPINT_RPI.7
  Top 0.61: 33.81,132.1 54.21,111.7 54.21,40.9 v56.11,39.15
  Bottom 0.61: v56.11,39.15 56.62,38.64 56.63,37.97 59.28,35.33 60.63,35.33 61.11,34.85 77.27,34.85 77.57,35.15 77.57,45.62 69.09,54.1 69.07,54.1 67.27,55.9 66.5,55.9 MCP1.20
INTA
  Top 0.61: JP_MCPINT_RPI.1 CONN_RPI.2
  Bottom 0.61: CONN_RPI2.12 109.83,132.63 107.96,134.5 20.21,134.5 18.21,132.5 JP_MCPINT_RPI.1
INTB
  Top 0.61: JP_MCPINT_RPI.2 CONN_RPI.4
  Bottom 0.61: CONN_RPI2.10 107.01,127.3 104.48,129.83 23.54,129.83 21.01,127.3 CONN_RPI.4
INTC
  Top 0.61: JP_MCPINT_RPI.3 CONN_RPI.6
  Bottom 0.61: CONN_RPI2.8 104.61,127.3 103.26,128.65 25.16,128.65 23.81,127.3 CONN_RPI.6
INTD
  Top 0.61: CONN_RPI2.6 102.21,137.63 101.63,138.21 27.23,138.21 26.01,136.99 JP_MCPINT_RPI.4 CONN_RPI.8
INTE
  Top 0.61: CONN_RPI2.4 99.67,135.58 98.57,136.67 29.17,136.67 28.78,136.27 28.55,135.07 JP_MCPINT_RPI.5 CONN_RPI.10
INTF
  Top 0.61: CONN_RPI2.2 95.36,130.04 41.89,130.04 36.65,135.29 32.55,135.29 31.09,133.83 JP_MCPINT_RPI.6 CONN_RPI.12
N$1
  Top 0.61: 8.23,15.34 13.31,15.34
N$2
  Top 0.61: 10.77,17.88 10.77,12.8
N$3
  Top 0.61: 5.69,137.26 5.69,132.18
N$4
  Top 0.61: 3.15,134.72 8.23,134.72
N$5
  Top 0.61: 119.99,137.26 119.99,132.18
N$6
  Top 0.61: 122.53,134.72 117.45,134.72
N$7
  Top 0.61: 117.45,10.26 117.45,5.18
N$8
  Top 0.61: 114.91,7.72 119.99,7.72
N$9
  Bottom 0.61: 10.77,12.8 10.77,17.88
N$10
  Bottom 0.61: 13.31,15.34 8.23,15.34
N$11
  Bottom 0.61: 5.69,132.18 5.69,137.26
N$12
  Bottom 0.61: 3.15,134.72 8.23,134.72
N$13
  Bottom 0.61: 119.99,137.26 119.99,132.18
N$14
  Bottom 0.61: 117.45,134.72 122.53,134.72
N$15
  Bottom 0.61: 117.45,10.26 117.45,5.18
N$16
  Bottom 0.61: 114.91,7.72 119.99,7.72
RST_MCP  (via drill 0.35)
  Top 0.4: 79.91,120.8 v79.81,120.9
  Top 0.61: CONN_RPI.9 R_RST_MCP23017.2 | MCP1.18 68.94,50.9 71.73,53.7 71.73,78.08 70.71,79.1 70.71,106.27 81.12,116.68 81.12,119.59 79.91,120.8 79.91,120.92 83.89,124.9 88.24,124.9 92.82,120.32 102.83,120.32 107.07,124.56 CONN_RPI2.9
  Bottom 0.61: R_RST_MCP23017.2 29.97,120.9 v79.81,120.9
SCL  (via drill 0.35)
  Top 0.4: 58.87,48.36 MCP1.12
  Top 0.61: CONN_RPI.7 26.02,123.22 23.53,120.73 12.49,120.73 10.53,118.76 10.53,110.11 11.32,109.32 CON_IS31_B.3 | v67.61,115.44 67.61,113.33 61.06,106.78 61.09,106.75 v61.09,104.84 61.09,49.41 60.3,48.62 59.12,48.62 58.87,48.36
  Bottom 0.406: 90.07,115.94 83.58,115.94 83.11,115.47 67.64,115.47 v67.61,115.44
  Bottom 0.61: CON_IS31_B.3 17.62,109.32 22.1,104.84 v61.09,104.84 | CONN_RPI2.7 96.13,115.94 90.07,115.94
SDA  (via drill 0.35)
  Top 0.4: 58.87,45.82 MCP1.13
  Top 0.61: CONN_RPI.5 23.47,123.29 22.65,122.47 11.85,122.47 8.76,119.39 8.76,107.94 9.92,106.78 CON_IS31_B.4 | CONN_RPI2.5 102.21,123.42 101.16,122.37 95.12,122.37 90.24,127.25 73.95,127.25 v69.82,123.13 69.82,120.62 70.97,119.48 70.97,112.85 63.11,104.99 63.11,84.06 62.2,83.16 62.2,47.73 60.3,45.82 58.87,45.82
  Bottom 0.61: CONN_RPI.5 24.95,123.08 69.77,123.08 v69.82,123.13
VCC
  Top 0.4: 59.11,33.09 1-C1-MCP.1 | 59.11,38.1 58.93,38.17 1-C2_MCP.+ | 19.69,82.65 R2_E5.1 | 58.11,93.1 R1_E5.1 57.61,92.6 55.88,90.88 | 110.21,124.5 CONN_RPI2.11 | 112.21,124.5 CONN_RPI2.13
  Top 0.61: 59.11,33.09 59.11,38.1 59.03,38.18 59.03,39.22 56.52,41.73 55.36,41.73 55.36,58.12 | 112.21,124.5 110.21,124.5 | CON_IS31_B.1 13.36,114.15 17.63,114.15 20.93,117.45 32.11,117.45 33.63,118.97 R_RST_MCP23017.1 CONN_RPI.13 CONN_RPI.11 | R3_E5.1 58.68,115.67 58.11,115.1 58.11,93.1 57.61,92.6 | R1_E5.1 55.88,90.94 55.88,90.88 55.88,87.24 55.36,86.72 55.36,58.12 | 15.87,6.48 R2_E1.1 | R1_E1.1 10.77,35.66 13.31,38.2 R2_E3.1 13.31,53.7 17.63,58.01 17.63,64.11 R3_E3.1 20.11,66.6 20.11,82.23 19.69,82.65 | R1_E2.1 103.61,5.31 103.61,41.88 R2_E4.1 102.11,43.38 102.11,51.92 109.63,59.44 R3_E4.1 109.37,64.87 107.09,67.16 R1_E6.1 107.09,90.22 104.75,92.56 104.75,104.96 97.51,112.2 97.51,115.55 95.86,117.2 | MCP1.9 57.51,55.98 55.36,58.12 | R2_E2.1 119.48,33.88 119.48,38.71 R1_E4.1 | R3_E6.1 85.7,122.28 90.78,117.2 95.86,117.2 | CONN_RPI2.11 102.46,117.2 95.86,117.2
  Top 0.813: R1_E3.1 15.87,28.07 15.87,6.48
  Bottom 0.61: R2_E3.1 13.61,43.1 20.61,36.1 23.11,36.1 R1_E3.1 23.61,36.1 55.84,36.1 1-C1-MCP.1 | R1_E4.1 116.11,42.1 103.61,42.1 R2_E4.1 | R1_E5.1 58.11,93.1 67.61,93.1 R2_E6.1 | 60.38,117.37 62.61,119.6 82.11,119.6 85.61,123.1 R3_E6.1 | R_RST_MCP23017.1 34.9,118.21 53.31,118.21 53.38,118.13 59.62,118.13 60.38,117.37 | R3_E5.1 59.03,116.02 60.38,117.37 | SV1.2 SV1.4 SV1.6 71.73,42.22 72.19,41.76 74.02,41.76 74.47,41.3 74.47,36.63 74.02,36.17 63.35,36.17 62.08,37.44 59.59,37.44 1-C2_MCP.+
(copper drawn outside any net)
  shapes: Bottom circle x4, Top circle x4

## Text on the board
Top: TOP | THeMiS / Frontpane v1
Bottom: BOTTOM